# Altium PCB AquaBot Stock Controller.PcbDoc
Units mm, origin at the board's own origin, x right, y up, seen from the top; angles counter-clockwise.
Board outline 80 x 60 mm, 2 copper layers (Top Layer, Bottom Layer), stack 1.569 mm thick; 6 components, 9 nets, 38 pads, 1 vias.
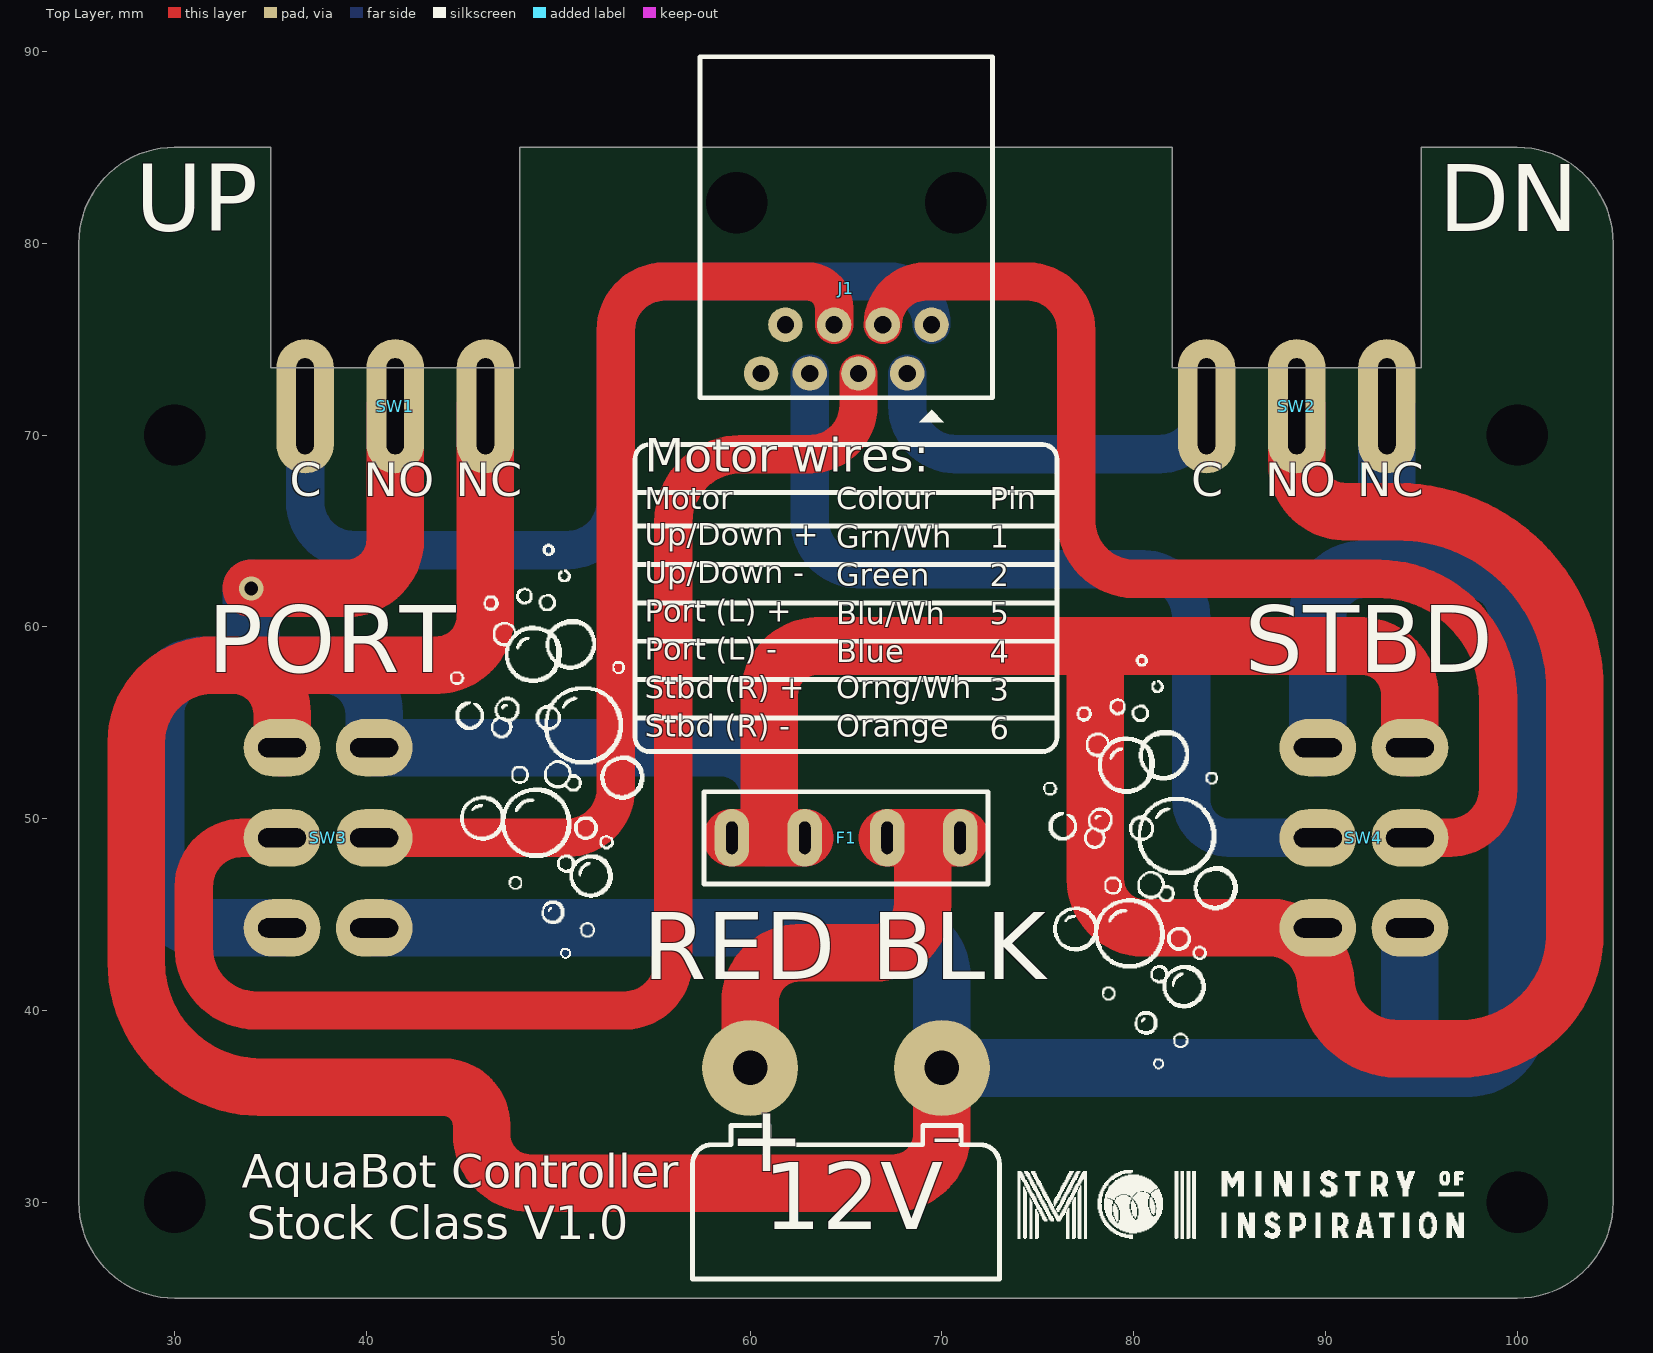
[diagram p0: Top Layer view]
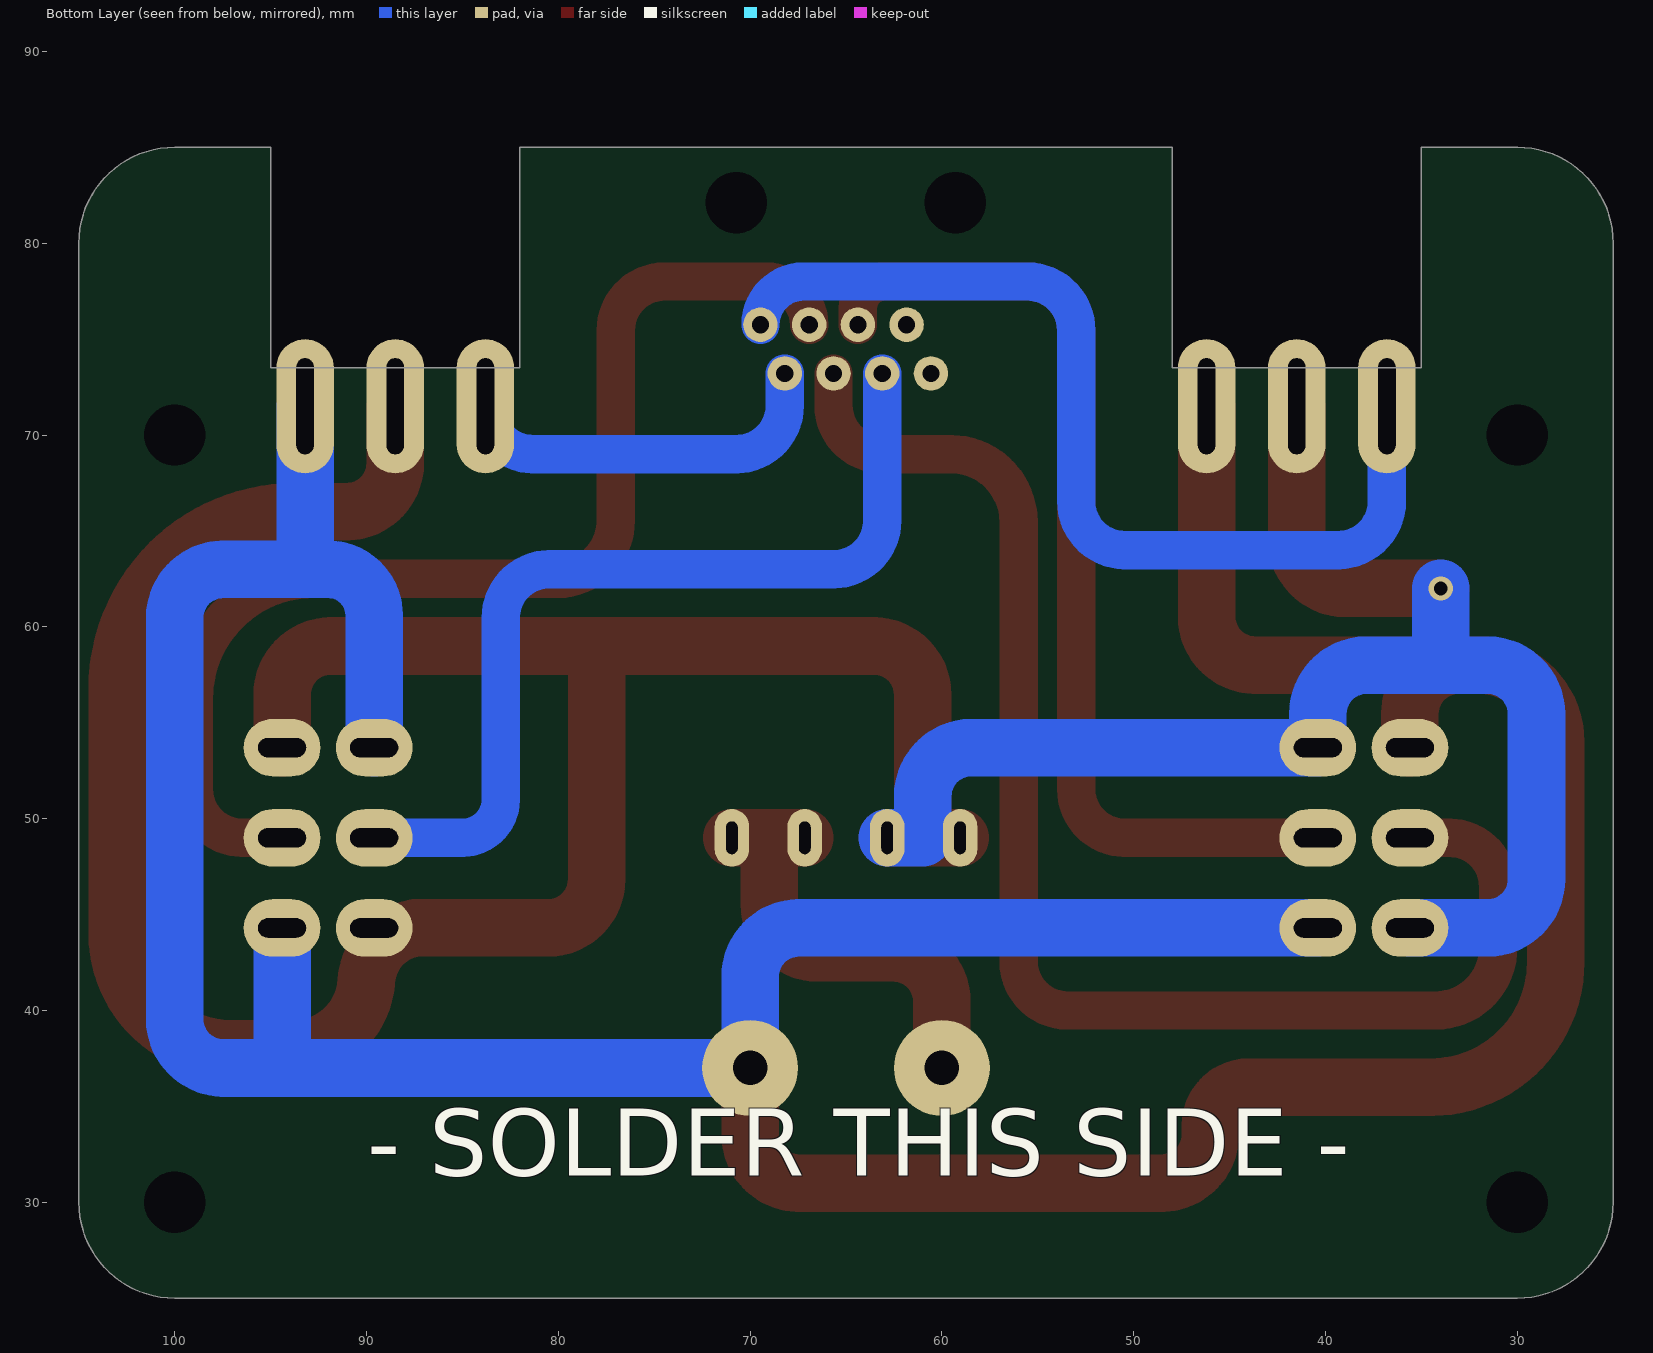
[diagram p1: Bottom Layer view, seen from below]
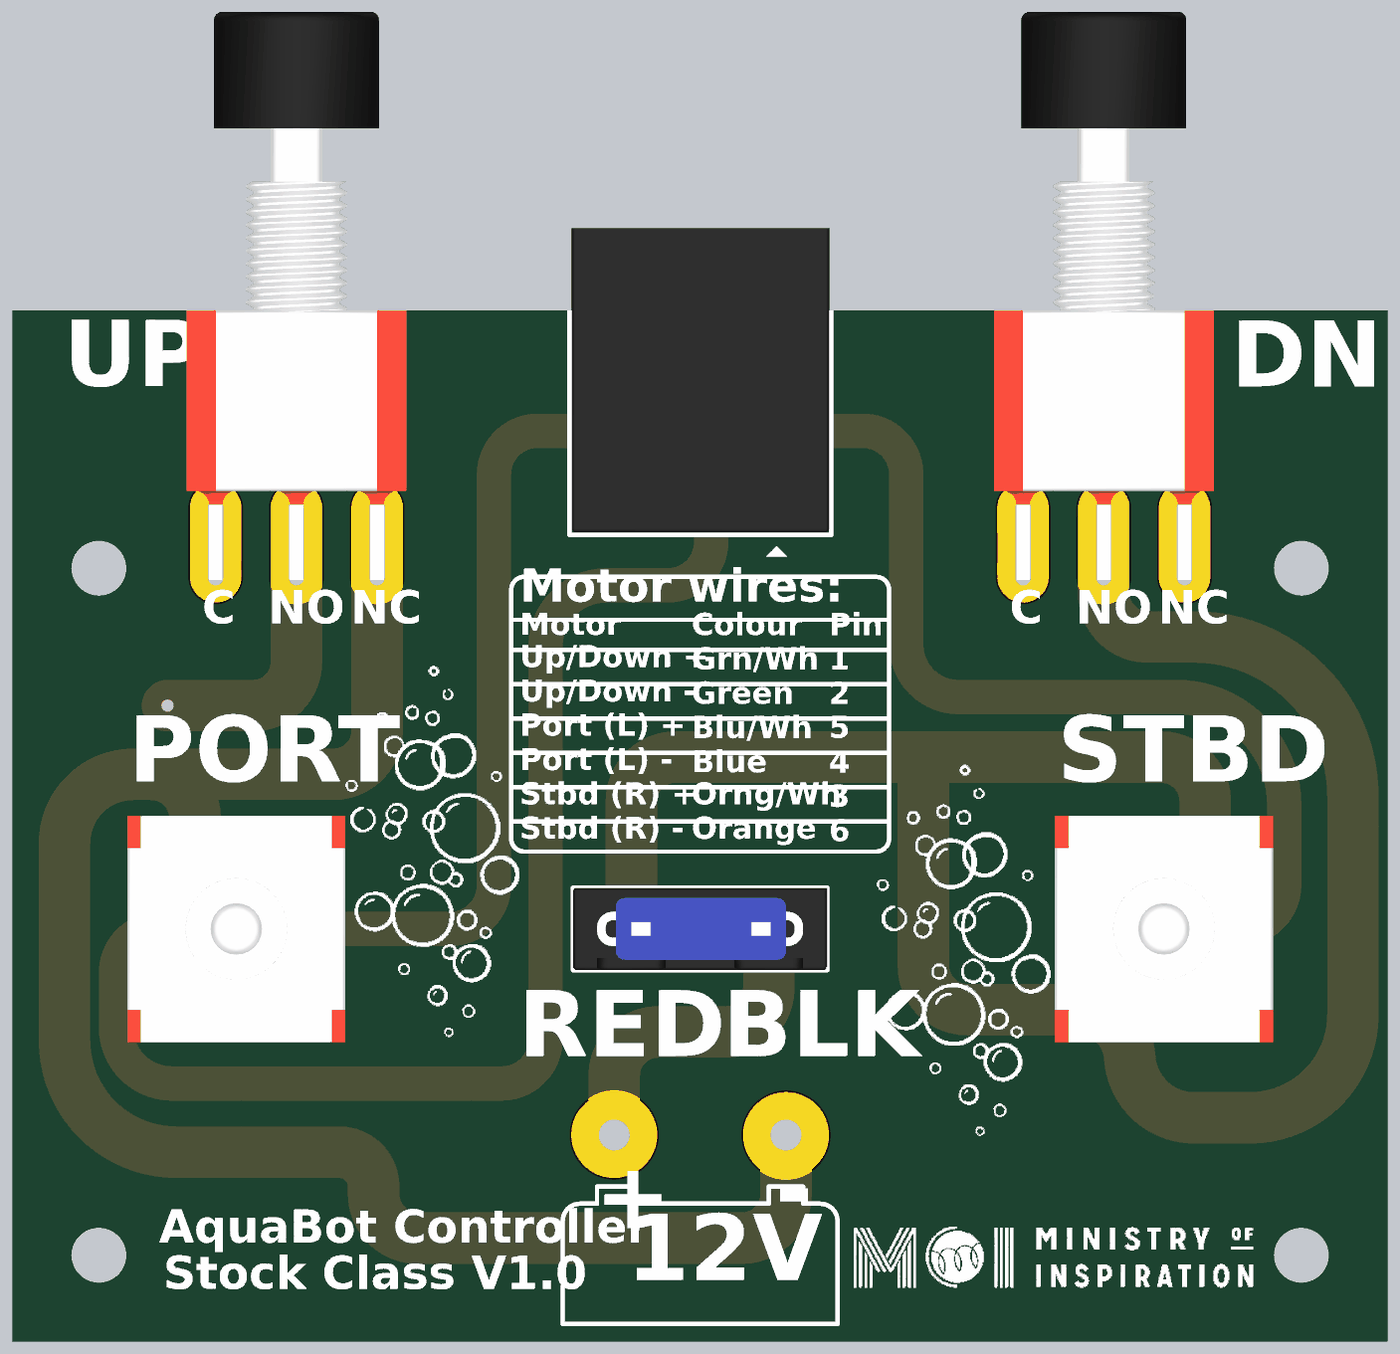
[diagram p2: 3D render of the assembled board from above, using the file's embedded part models]

## Layer stack, top to bottom
Top Solder: solder mask 0.0254, SM-001, Dk 4
Top Layer: signal copper 0.035
Dielectric 1: core 1.4986, Core-043, Dk 4.3
Bottom Layer: signal copper 0.035
Bottom Solder: solder mask 0.0254, SM-001, Dk 4

## Board outline
105,30 cw(c100,30) 100,25 30,25 cw(c30,30) 25,30 25,80 cw(c30,80) 30,85 35,85 35,73.5 48,73.5 48,85 82,85 82,73.5 95,73.5 95,85 100,85 cw(c100,80) 105,80

## Design rules (kind name [scope] priority, off if disabled: settings)
Clearance [All] p1: gap=0.254 ignorepadtopadclearanceinfootprint=FALSE
HoleSize [All] p1: absolutevalues=TRUE maxlimit=500 minlimit=0.3 maxpercent=80.000 minpercent=20.000
PolygonConnect [All] p1: connectstyle=Relief reliefconductorwidth=0.254 reliefentries=4 polygonreliefangle="90 Angle" airgapwidth=0.254
RoutingVias [All] p1: holewidth=0.711 width=1.27 viastyle="Through Hole" minholewidth=0.711 minwidth=1.27 maxholewidth=0.711 maxwidth=1.27
SolderMaskExpansion [All] p1: expansion=0.102 istentingtop=FALSE
SupplyNets "Schematic Supply Nets_2" [InNet('-B')] p1: voltage=0.000
SupplyNets "Schematic Supply Nets_1" [InNet('+B')] p2: voltage=0.000
SupplyNets "Schematic Supply Nets" [InNet('+12V')] p3: voltage=0.000
Width [All] p1: maxlimit=5 minlimit=1 preferedwidth=3
29 further rules are at their usual default settings.

## Components (designator, comment, footprint, x,y, rotation, side; value= is the part's Value field where it differs from the comment)
F1 "Automotive Micro Fuse Holder" "Automotive Micro Fuse Holder-Footprint-1" 65,49 r180 top locked
J1 "RJ45" RJ45-Footprint-1 65.015,74.48 r180 top locked
SW1 "PS-102" PS-102-Footprint-RA 41.5,71.5 r0 top locked
SW2 "PS-102" PS-102-Footprint-RA 88.5,71.5 r0 top locked
SW3 "MTS-223" MTS-223-Footprint-1 38,49 r270 top locked
SW4 "MTS-223" MTS-223-Footprint-1 92,49 r270 top locked

## Footprints (in the part's own frame and the unit in brackets; to place one, negate y for a bottom-side part, rotate by r counter-clockwise, add the part's x,y. Pads: shape width x height; smd on the part's side, far side on the other; paste and mask are expansions set on the pad)
"Automotive Micro Fuse Holder-Footprint-1" [mm]
  oval 1.8x3 hole 0.6 slot 1.7 at 90 deg: 1(-5.95,0) 1(-2.15,0) 2(2.15,0) 2(5.95,0)
  silkscreen extent -7.4,-2.4 7.4,2.4, body extent -7.4,-2.4 7.4,2.4, height 11.8
MTS-223-Footprint-1 [mm]
  oval 3x4 hole 1 slot 2.5 at 90 deg: 1(-4.7,-2.4) 2(0,-2.4) 3(4.7,-2.4) 4(-4.7,2.4) 5(0,2.4) 6(4.7,2.4)
  body extent -6.6,-6.35 6.6,6.35, height 30.1
PS-102-Footprint-RA [mm]
  oval 3x7 hole 0.9 slot 5 at 90 deg: 1(-4.7,0) 2(0,0) 3(4.7,0)
  body extent -6.4,-2.2 6.4,30.9, height 4.79
RJ45-Footprint-1 [mm]
  round 1.8 hole 0.9: 1(-4.445,-1.27) 2(-3.175,1.27) 3(-1.905,-1.27) 4(-0.635,1.27) 5(0.635,-1.27) 6(1.905,1.27) 7(3.175,-1.27) 8(4.445,1.27)
  round 0 hole 3.2 unplated: ""(-5.715,-7.62) ""(5.715,-7.62)
  silkscreen extent -7.62,-15.24 7.62,3.81, body extent -7.5,-15.32 7.5,2.38, height 12.6

## Part data
F1: library part CMP-005-00000-1, "PTH fuse holder"
J1: library part CMP-002-00005-1, "Aliexpress RJ45 network interface full plastic 90 degree short body length of about 17.7MM network socket 8P8C socket - RJ-45-8P 5801-10P8C"
SW1 SW2: library part CMP-011-00002-1, "Momentary push button std 6mm mounting"
SW3 SW4: library part CMP-011-00001-1, "On Off On momentary toggle switch DPDT"

## Free pads (board coordinates)
  round 5 hole 1.8: +B(60,37) -B(70,37)
  round 0 hole 3.2 unplated: ""(30,30) ""(30,70) ""(100,30) ""(100,70)

## Via types
v1: diameter 1.27, hole 0.711, Top Layer to Bottom Layer, tented both sides, 1 vias

## Nets (pads, with @x,y where several pads share a name; then routed paths per layer and width w, separated by ;. In a path a pad name is that pad's centre, name@x,y a point inside that pad or via, vN(x,y) a via of type N, cw(c..) or ccw(c..) an arc to the next point about the centre after c; other vN are vias at no path point)
+12V: F1.2 SW1.2 SW2.2 SW3.3 SW3.4 SW4.3 SW4.4 | length 212
  Top Layer w3: v1(34,62) 38.96,62 ccw(c38.96,64.54) 41.5,64.54 SW1.2 ; F1.2@59.05,49 61,49 ; F1.2@62.85,49 61,49 ; SW2.2 88.5,68.54 ccw(c91.04,68.54) 91.04,66 93.75,66 cw(c93.75,56.75) 103,56.75 103,44 cw(c97,44) 97,38 93.76,38 cw(c93.76,41.76) 90.007,41.525 ccw(c87.013,41.333) 87.46,44.3 80.54,44.3 cw(c80.54,46.84) 78,46.84 78,59 ; SW4.4 94.4,56.46 ccw(c91.86,56.46) 91.86,59 78,59 ; 61,49 61,56.46 cw(c63.54,56.46) 63.54,59 78,59
  Bottom Layer w3: v1(34,62) 34,59 ccw(c35,59) 35,58 ; SW3.3 31.54,44.3 cw(c31.54,46.84) 29,46.84 29,55.46 cw(c31.54,55.46) 31.54,58 35,58 ; F1.2@62.85,49 61,49 61,51.16 ccw(c58.46,51.16) 58.46,53.7 SW3.4 40.4,55.46 ccw(c37.86,55.46) 37.86,58 35,58
+B: F1.1 pad.+B | length 22.6
  Top Layer w3: pad.+B 60,40.46 cw(c62.54,40.46) 62.54,43 66.46,43 ccw(c66.46,45.54) 69,45.54 69,49 ; F1.1@67.15,49 F1.1@70.95,49
-B: pad.-B SW1.3 SW2.3 SW3.1 SW3.6 SW4.1 SW4.6 | length 228.9
  Top Layer w3: SW3.1 35.6,55.46 ccw(c33.06,55.46) 33.06,58 ; SW1.3 46.2,60.54 cw(c43.66,60.54) 43.66,58 33.06,58 ; pad.-B 70,33.54 cw(c67.46,33.54) 67.46,31 48.54,31 cw(c48.54,33.54) 46,33.54 46,34 ccw(c44,34) 44,36 34.5,36 cw(c34.5,42.5) 28,42.5 28,54 cw(c32,54) 32,58 33.06,58
  Bottom Layer w3: SW3.6 67.46,44.3 cw(c67.46,41.76) 70,41.76 pad.-B 95,37 ; SW4.1 89.6,60.6 cw(c92,60.6) 92,63 ; SW2.3 93.2,64.2 cw(c92,64.2) 92,63 ; SW4.6 94.4,37.6 ccw(c95,37.6) 95,37 ; 92,63 97.46,63 cw(c97.46,60.46) 100,60.46 100,39.54 cw(c97.46,39.54) 97.46,37 95,37
DOWN: J1.2 SW2.1 | length 20.2
  Bottom Layer w2: J1.2 68.19,71.54 ccw(c70.73,71.54) 70.73,69 81.3,69 ccw(c81.3,71.5) SW2.1
PORT_FWD: J1.5 SW3.5 | length 52.5
  Top Layer w2: SW3.5 50.46,49 ccw(c50.46,51.54) 53,51.54 53,75.46 cw(c55.54,75.46) 55.54,78 63,78 cw(c63,76.62) 64.38,76.62 J1.5
PORT_REV: J1.4 SW3.2 | length 75.3
  Top Layer w2: SW3.2 33.54,49 ccw(c33.54,46.46) 31,46.46 31,43.25 ccw(c34.25,43.25) 34.25,40 53.46,40 ccw(c53.46,42.54) 56,42.54 56,65.46 cw(c59.54,65.46) 59.54,69 63.11,69 ccw(c63.11,71.54) 65.65,71.54 J1.4
STBD_FWD: J1.3 SW4.5 | length 60.8
  Top Layer w2: J1.3 cw(c69.17,75.75) 69.17,78 74.46,78 cw(c74.46,75.46) 77,75.46 77,65.54 ccw(c80.04,65.54) 80.04,62.5 92.75,62.5 cw(c92.75,56.25) 99,56.25 99,51.54 cw(c96.46,51.54) 96.46,49 SW4.5
STBD_REV: J1.6 SW4.2 | length 47.7
  Bottom Layer w2: J1.6 63.11,65.54 ccw(c65.65,65.54) 65.65,63 80.46,63 cw(c80.46,60.46) 83,60.46 83,51 ccw(c85,51) 85,49 SW4.2
UP: J1.1 SW1.1 | length 52.2
  Bottom Layer w2: SW1.1 36.8,66.54 ccw(c39.34,66.54) 39.34,64 50.46,64 ccw(c50.46,66.54) 53,66.54 53,75.46 cw(c55.54,75.46) 55.54,78 67.21,78 cw(c67.21,75.75) J1.1
pads on no net: J1. J1.7 J1.8

## Silkscreen, mask and mechanical layers (free items; w line width, h text height)
Top Overlay:
  drawing of 130 lines, arcs and shapes, not listed
  text "UP" at 27.938,79.502 h6
  text "DN" at 95.892,79.477 h6
  text "Motor wires:" at 54.5,67.501 h3
  text "C" at 36.01,66.239 h3
  text "NO" at 39.856,66.239 h3
  text "NC" at 44.652,66.239 h3
  text "C" at 83.01,66.239 h3
  text "NO" at 86.856,66.239 h3
  text "NC" at 91.652,66.239 h3
  text "Motor" at 54.5,65.751 h2
  text "Colour" at 64.5,65.743 h2
  text "Pin" at 72.5,65.743 h2
  text "Up/Down +" at 54.5,63.874 h2
  text "Grn/Wh" at 64.5,63.743 h2
  text "1" at 72.5,63.735 h2
  text "Up/Down -" at 54.5,61.874 h2
  text "Green" at 64.5,61.743 h2
  text "2" at 72.5,61.735 h2
  text "Port (L) +" at 54.5,59.884 h2
  text "Blu/Wh" at 64.5,59.743 h2
  text "5" at 72.5,59.751 h2
  text "Port (L) -" at 54.5,57.884 h2
  text "Blue" at 64.5,57.751 h2
  text "4" at 72.5,57.735 h2
  text "PORT" at 31.714,56.477 h6
  text "STBD" at 85.789,56.477 h6
  text "Stbd (R) +" at 54.5,55.884 h2
  text "Orng/Wh" at 64.5,55.883 h2
  text "3" at 72.5,55.743 h2
  text "Stbd (R) -" at 54.5,53.884 h2
  text "Orange" at 64.5,53.883 h2
  text "6" at 72.5,53.743 h2
  text "RED" at 54.412,40.477 h6
  text "BLK" at 66.312,40.477 h6
  text "-" at 69.383,30.89 h6
  text "+" at 58.867,30.48 h6
  text "AquaBot Controller" at 33.5,30.186 h3
  text "Stock Class V1.0" at 33.75,27.489 h3
  text "12V" at 60.682,27.452 h6
Bottom Overlay:
  text "- SOLDER THIS SIDE -" at 89.954,30.227 h6